# Altium PCB LS1C300B_176A_Msystem.PcbDoc (part 2 of 3)
Units mm, origin at the board's own origin, x right, y up, seen from the top; angles counter-clockwise.
Board outline 100.25 x 70.25 mm, 2 copper layers (Top Layer, Bottom Layer); 139 components, 183 nets, 683 pads, 164 vias.
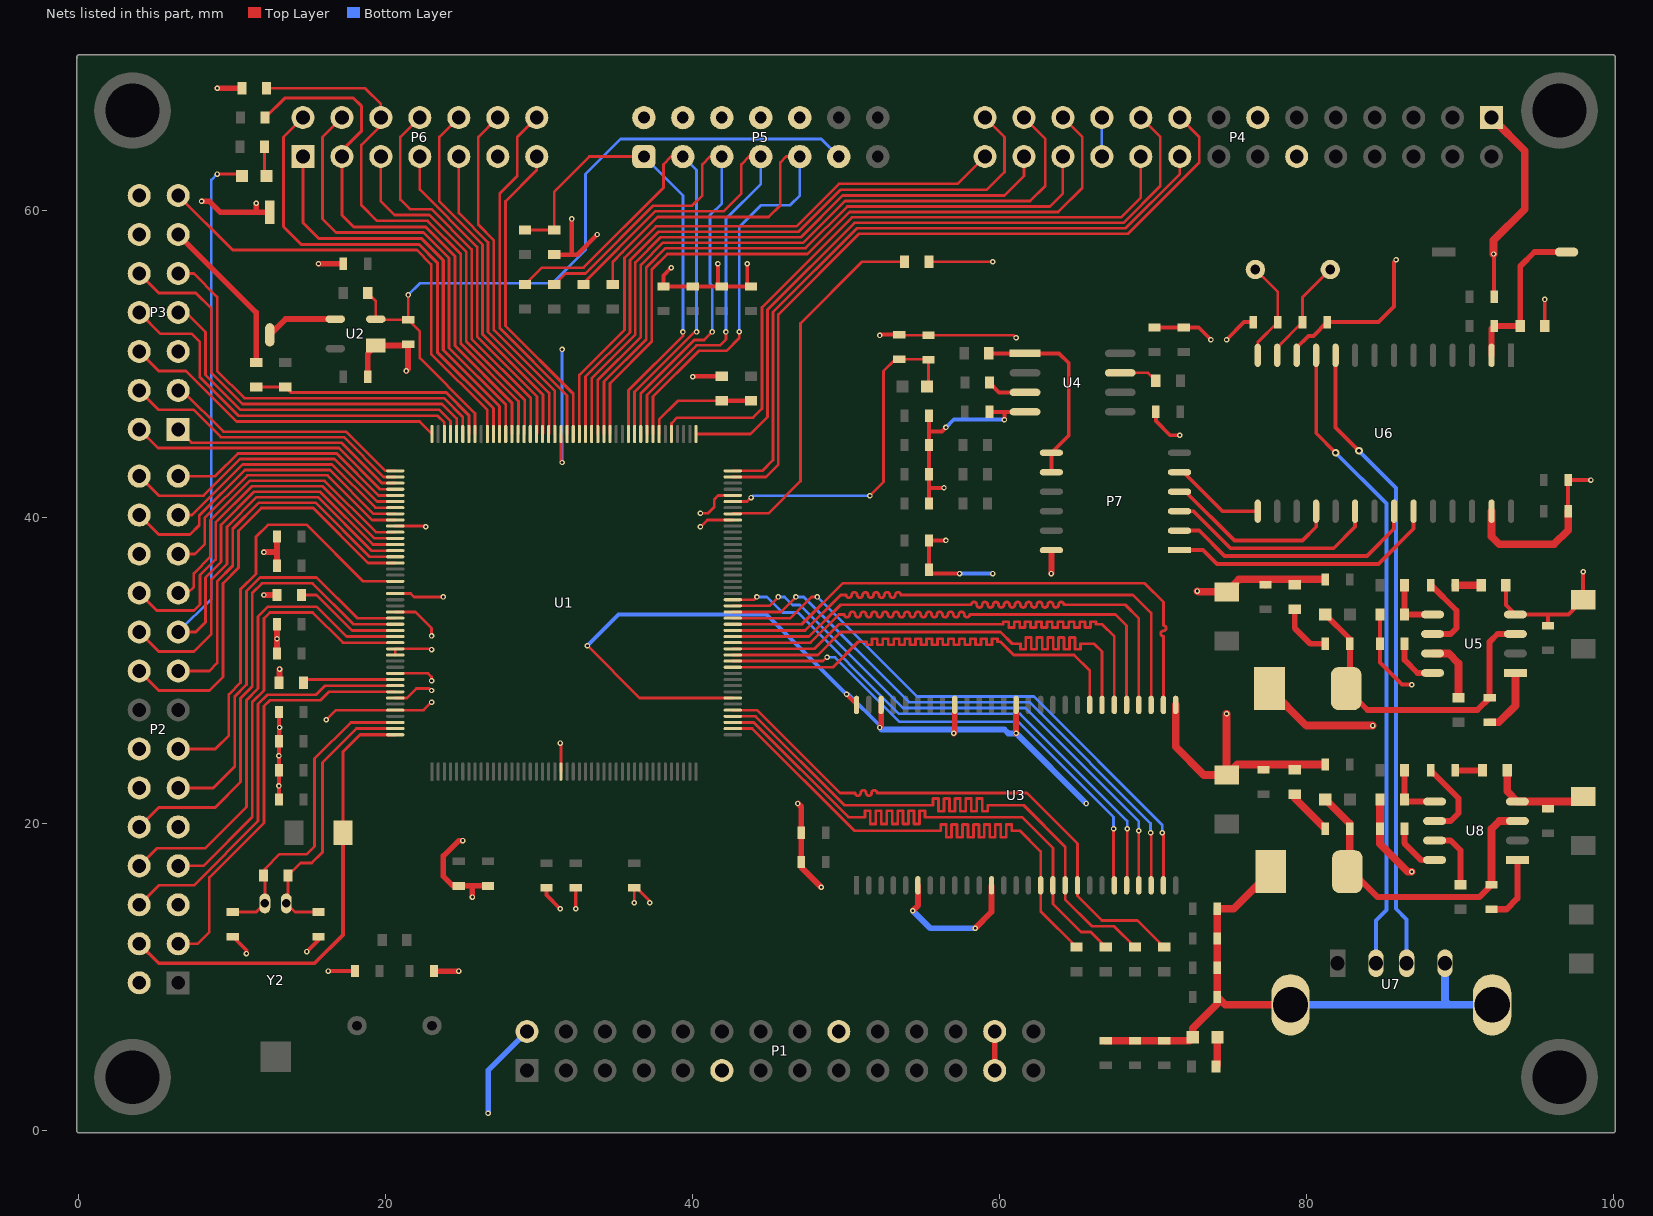
[diagram p2: the nets of this part, all layers, seen from the top]

## Via types
v1: diameter 0.356, hole 0.178, Top Layer to Bottom Layer, 153 vias
v2: diameter 0.508, hole 0.254, Top Layer to Bottom Layer, 4 vias
v3: diameter 1.5, hole 0.75, Top Layer to Bottom Layer, 3 vias
v4: diameter 0.762, hole 0.381, Top Layer to Bottom Layer, 2 vias
v5: diameter 0.6, hole 0.3, Top Layer to Bottom Layer, 1 vias
v6: diameter 0.8, hole 0.4, Top Layer to Bottom Layer, 1 vias

## Nets (pads, with @x,y where several pads share a name; then routed paths per layer and width w, separated by ;. In a path a pad name is that pad's centre, name@x,y a point inside that pad or via, vN(x,y) a via of type N, cw(c..) or ccw(c..) an arc to the next point about the centre after c; other vN are vias at no path point) (continued)
87: P4.17 U1.87 | length 48.1
  Top Layer w0.178: U1.87@42.623,42.617 44.776,42.617 45.593,43.434 45.593,53.213 50.851,58.471 68.382,58.471 73.025,63.114 73.025,64.77 P4.17@71.755,66.04
88: P4.18 U1.88 | length 43.9
  Top Layer w0.178: U1.88@42.623,43.017 44.541,43.017 45.237,43.713 45.237,53.36 50.704,58.826 68.224,58.826 71.755,62.357 P4.18@71.755,63.5
89: P4.19 U1.89 | length 46
  Top Layer w0.178: U1.89@40.223,45.417 43.766,45.417 44.882,46.533 44.882,53.518 50.546,59.182 68.072,59.182 70.485,61.595 70.485,64.77 P4.19@69.215,66.04
93: P4.20 U1.93 | length 43.9
  Top Layer w0.178: U1.93@38.623,45.417 38.623,46.116 38.989,46.482 43.942,46.482 44.526,47.066 44.526,53.67 50.394,59.538 67.92,59.538 69.215,60.833 P4.20@69.215,63.5
103: P4.23 U1.103 | length 47.2
  Top Layer w0.178: U1.103@34.623,45.417 34.623,48.72 37.338,51.435 37.338,56.134 38.354,57.15 47.498,57.15 50.241,59.893 63.83,59.893 65.405,61.468 65.405,64.77 P4.23@64.135,66.04
104: P4.24 U1.104 | length 43.6
  Top Layer w0.178: U1.104@34.223,45.417 34.223,48.828 36.982,51.587 36.982,56.281 38.232,57.531 47.371,57.531 50.089,60.249 63.297,60.249 64.135,61.087 P4.24@64.135,63.5
105: P4.25 U1.105 | length 45.7
  Top Layer w0.178: U1.105@33.823,45.417 33.823,48.936 36.627,51.74 36.627,56.429 38.085,57.887 47.219,57.887 49.936,60.604 62.001,60.604 62.992,61.595 62.992,64.643 P4.25@61.595,66.04
106: P4.26 U1.106 | length 41.3
  Top Layer w0.178: U1.106@33.423,45.417 33.423,49.044 36.271,51.892 36.271,56.591 37.922,58.242 47.066,58.242 49.784,60.96 60.325,60.96 61.595,62.23 P4.26@61.595,63.5
107: P4.27 U1.107 | length 43.4
  Top Layer w0.178: U1.107@33.023,45.417 33.023,49.152 35.916,52.045 35.916,56.744 37.77,58.598 46.914,58.598 49.657,61.341 59.182,61.341 60.325,62.484 60.325,64.77 P4.27@59.055,66.04
108: P4.28 U1.108 | length 38.9
  Top Layer w0.178: U1.108@32.623,45.417 32.623,49.26 35.56,52.197 35.56,56.896 37.617,58.953 46.761,58.953 49.53,61.722 57.277,61.722 P4.28@59.055,63.5
109: P6.13 U1.109 | length 20.8
  Top Layer w0.178: P6.13@29.845,63.5 29.845,62.611 27.813,60.579 27.813,52.451 32.223,48.041 U1.109@32.223,45.417
110: P6.14 U1.110 | length 23.4
  Top Layer w0.178: P6.14@29.845,66.04 28.575,64.77 28.575,62.23 27.432,61.087 27.432,52.324 31.823,47.933 U1.110@31.823,45.417
112: P6.12 U1.112 | length 23.2
  Top Layer w0.178: P6.12@27.305,66.04 26.035,64.77 26.035,59.055 27.051,58.039 27.051,52.197 31.023,48.225 U1.112@31.023,45.417
113: P6.9 U1.113 | length 20.5
  Top Layer w0.178: P6.9@24.765,63.5 24.765,59.817 26.67,57.912 26.67,52.07 30.656,48.084 30.656,45.45 U1.113@30.623,45.417
114: P6.10 U1.114 | length 24
  Top Layer w0.178: P6.10@24.765,66.04 23.495,64.77 23.495,60.579 26.314,57.76 26.314,51.918 30.256,47.976 30.256,45.45 U1.114@30.223,45.417
115: P6.7 U1.115 | length 21.3
  Top Layer w0.178: P6.7@22.225,63.5 22.225,61.341 25.959,57.607 25.959,51.765 29.856,47.868 29.856,45.45 U1.115@29.823,45.417
116: P6.8 U1.116 | length 25.5
  Top Layer w0.178: P6.8@22.225,66.04 20.955,64.77 20.955,60.706 21.59,60.071 22.987,60.071 25.603,57.455 25.603,51.613 29.456,47.76 29.456,45.45 U1.116@29.423,45.417
117: P6.5 U1.117 | length 23.3
  Top Layer w0.178: P6.5@19.685,63.5 19.685,60.579 20.574,59.69 22.86,59.69 25.248,57.302 25.248,51.46 29.056,47.652 29.056,45.45 U1.117@29.023,45.417
118(5): P6.6 R16.2 U1.118 | length 36.1
  Top Layer w0.178: R16.2@12.23,67.945 18.669,67.945 19.685,66.929 P6.6@19.685,66.04 19.685,65.532 18.415,64.262 18.415,60.325 19.431,59.309 22.733,59.309 24.892,57.15 24.892,51.308 28.656,47.544 28.656,45.45 U1.118@28.623,45.417
119(4): P6.3 R15.2 U1.119 | length 36.3
  Top Layer w0.2: R15.2@12.141,66.04 13.411,67.31 17.907,67.31 18.415,66.802 18.415,65.151 17.145,63.881 P6.3@17.145,63.5 17.145,59.69 17.921,58.914 22.61,58.914 24.511,57.012 24.511,51.17 28.223,47.458 U1.119@28.223,45.417
120: P6.4 U1.120 | length 29.4
  Top Layer w0.178: P6.4@17.145,66.04 15.875,64.77 15.875,59.436 16.764,58.547 22.458,58.547 24.13,56.875 24.13,51.033 27.823,47.34 U1.120@27.823,45.417
121: P6.1 U1.121 | length 27.3
  Top Layer w0.2: P6.1@14.605,63.5 14.605,59.182 15.621,58.166 22.32,58.166 23.749,56.737 23.749,50.895 27.423,47.221 U1.121@27.423,45.417
122: P6.2 U1.122 | length 31.3
  Top Layer w0.2: P6.2@14.605,66.04 13.335,64.77 13.335,58.928 14.492,57.771 22.181,57.771 23.368,56.584 23.368,50.742 27.023,47.087 U1.122@27.023,45.417
123: P3.13 U1.123 | length 30.9
  Top Layer w0.178: P3.13@6.477,60.96 10.033,57.404 22.029,57.404 22.962,56.472 22.962,50.63 26.623,46.968 U1.123@26.623,45.417
127: P3.9 U1.127 | length 26.4
  Top Layer w0.178: P3.9@6.477,55.88 7.493,55.88 9.017,54.356 9.017,49.53 10.795,47.752 23.796,47.752 25.023,46.525 U1.127@25.023,45.417
128: P3.10 U1.128 | length 28.1
  Top Layer w0.178: P3.10@3.937,55.88 5.207,54.61 7.62,54.61 8.636,53.594 8.636,49.403 10.668,47.371 23.674,47.371 24.623,46.422 U1.128@24.623,45.417
129: P3.7 U1.129 | length 23.2
  Top Layer w0.178: P3.7@6.477,53.34 6.985,53.34 8.255,52.07 8.255,49.276 10.541,46.99 23.495,46.99 24.223,46.262 U1.129@24.223,45.417
130: P3.8 U1.130 | length 24.9
  Top Layer w0.178: P3.8@3.937,53.34 5.334,51.943 7.366,51.943 7.874,51.435 7.874,49.149 10.414,46.609 23.368,46.609 23.823,46.154 U1.130@23.823,45.417
132: P3.6 U1.132 | length 21.3
  Top Layer w0.178: P3.6@3.937,50.8 5.207,49.53 6.985,49.53 10.287,46.228 22.212,46.228 U1.132@23.023,45.417
133: P3.3 U1.133 | length 16.3
  Top Layer w0.178: P3.3@6.477,48.26 6.726,48.26 9.418,45.568 17.424,45.568 19.975,43.017 U1.133@20.623,43.017
134: P3.4 U1.134 | length 19
  Top Layer w0.178: P3.4@3.937,48.26 5.207,46.99 7.493,46.99 9.271,45.212 17.272,45.212 19.867,42.617 U1.134@20.623,42.617
135: P3.1 U1.135 | length 15.6
  Top Layer w0.178: P3.1@6.477,45.72 7.341,44.856 17.104,44.856 19.744,42.217 U1.135@20.623,42.217
136: P3.2 U1.136 | length 18.3
  Top Layer w0.178: P3.2@3.937,45.72 5.156,44.501 16.957,44.501 19.641,41.817 U1.136@20.623,41.817
137: P2.27 U1.137 | length 15.9
  Top Layer w0.178: P2.27@6.477,42.672 8.89,42.672 10.363,44.145 16.81,44.145 19.538,41.417 U1.137@20.623,41.417
138: P2.28 U1.138 | length 19.3
  Top Layer w0.178: P2.28@3.937,42.672 5.207,41.402 8.128,41.402 10.516,43.79 16.662,43.79 19.435,41.017 U1.138@20.623,41.017
139: P2.25 U1.139 | length 16.7
  Top Layer w0.178: P2.25@6.477,40.132 7.366,40.132 10.668,43.434 16.505,43.434 19.322,40.617 U1.139@20.623,40.617
140: P2.26 U1.140 | length 20.5
  Top Layer w0.178: P2.26@3.937,40.132 5.207,38.862 7.239,38.862 7.849,39.472 7.849,40.107 10.82,43.078 16.358,43.078 19.219,40.217 U1.140@20.623,40.217
141: P2.23 U1.141 | length 18.5
  Top Layer w0.178: P2.23@6.477,37.592 7.569,37.592 8.204,38.227 8.204,39.939 10.988,42.723 16.205,42.723 19.111,39.817 U1.141@20.623,39.817
143: P2.21 U1.143 | length 20.5
  Top Layer w0.178: P2.21@6.477,35.052 7.087,35.052 7.493,35.458 7.493,36.322 8.56,37.389 8.56,39.792 11.135,42.367 16.017,42.367 19.367,39.017 U1.143@20.623,39.017
144: P2.22 U1.144 | length 24.4
  Top Layer w0.178: P2.22@3.937,35.052 5.08,33.909 7.493,33.909 7.899,34.315 7.899,36.22 8.915,37.236 8.915,39.644 11.283,42.012 15.87,42.012 19.264,38.617 U1.144@20.623,38.617
145: D3.2 P2.19 U1.145 | length 55.2
  Top Layer w0.178: P2.19@6.477,32.512 7.62,32.512 8.255,33.147 8.255,36.068 9.271,37.084 9.271,39.497 11.43,41.656 15.722,41.656 19.161,38.217 U1.145@20.623,38.217 ; v1(9.017,62.357) 10.503,62.357 D3.2@10.63,62.23 D3.2@10.541,62.141
  Bottom Layer w0.178: P2.19@6.477,32.512 8.636,34.671 8.636,61.976 v1(9.017,62.357)
146: P2.20 U1.146 | length 26.3
  Top Layer w0.178: P2.20@3.937,32.512 5.207,31.242 7.493,31.242 8.636,32.385 8.636,35.941 9.652,36.957 9.652,39.37 11.582,41.3 15.575,41.3 19.059,37.817 U1.146@20.623,37.817
147: P2.17 U1.147 | length 24.7
  Top Layer w0.178: P2.17@6.477,29.972 8.509,29.972 9.017,30.48 9.017,35.814 10.033,36.83 10.033,39.243 11.735,40.945 15.428,40.945 18.956,37.417 U1.147@20.623,37.417
148: P2.18 U1.148 | length 28.6
  Top Layer w0.178: P2.18@3.937,29.972 5.207,28.702 8.509,28.702 9.398,29.591 9.398,35.687 10.414,36.703 10.414,39.106 11.897,40.589 15.281,40.589 18.853,37.017 U1.148@20.623,37.017
151: P2.13 U1.151 | length 28.3
  Top Layer w0.178: P2.13@6.477,24.892 8.89,24.892 9.779,25.781 9.779,28.448 10.541,29.21 10.541,35.301 11.544,36.304 11.544,38.722 12.319,39.497 14.859,39.497 18.539,35.817 U1.151@20.623,35.817
157: P2.11 U1.157 | length 27.2
  Top Layer w0.178: P2.11@6.477,22.352 8.763,22.352 10.16,23.749 10.16,28.321 10.922,29.083 10.922,35.179 11.811,36.068 15.494,36.068 18.145,33.417 U1.157@20.623,33.417
158: P2.10 U1.158 | length 31.1
  Top Layer w0.178: P2.10@3.937,19.812 5.207,21.082 8.89,21.082 10.541,22.733 10.541,28.194 11.303,28.956 11.303,35.052 11.938,35.687 15.24,35.687 17.91,33.017 U1.158@20.623,33.017
160: P2.8 U1.160 | length 31.3
  Top Layer w0.178: P2.8@3.937,17.272 5.08,18.415 8.23,18.415 10.922,21.107 10.922,28.067 11.684,28.829 11.684,33.523 12.324,34.163 15.494,34.163 17.44,32.217 U1.160@20.623,32.217
161: P2.7 U1.161 | length 28.9
  Top Layer w0.178: P2.7@6.477,17.272 8.128,17.272 11.303,20.447 11.303,27.94 12.065,28.702 12.065,33.401 12.446,33.782 15.24,33.782 17.205,31.817 U1.161@20.623,31.817
168: P2.6 U1.168 | length 27.1
  Top Layer w0.178: P2.6@3.937,14.732 5.207,16.002 7.493,16.002 11.684,20.193 11.684,27.813 12.294,28.423 15.469,28.423 16.063,29.017 U1.168@20.623,29.017
169: P2.3 U1.169 | length 27.5
  Top Layer w0.178: P2.3@6.477,12.192 7.747,12.192 8.509,12.954 8.509,16.51 12.065,20.066 12.065,27.686 12.446,28.067 15.748,28.067 16.298,28.617 U1.169@20.623,28.617
ADC_VDDA: C18.2 C19.2 L1.2 U1.83 | length 22.6
  Top Layer w0.178: U1.83@42.623,41.017 43.557,41.017 v1(43.815,41.275) ; v1(51.562,41.402) 52.451,42.291 52.451,49.53 53.213,50.292 C19.2@53.467,50.292 55.334,50.292 C18.2@55.372,50.254 55.372,48.603 L1.2@55.283,48.514
  Bottom Layer w0.178: v1(43.815,41.275) 43.942,41.402 v1(51.562,41.402)
C\H\_\C\S\: P7.5 U6.15 | length 6.1
  Top Layer w0.254: P7.5@71.739,42.926 72.009,42.926 74.549,40.386 U6.15@76.835,40.386
CH_CLK_SPI0_CLK: P7.4 U6.18 | length 11.6
  Top Layer w0.254: P7.4@71.739,41.656 72.136,41.656 75.311,38.481 79.756,38.481 80.645,39.37 U6.18@80.645,40.386
CH_MISO_SPI0_MISO: P7.2 U6.22 | length 16.5
  Top Layer w0.254: P7.2@71.739,39.116 73.025,39.116 74.676,37.465 83.947,37.465 85.725,39.243 U6.22@85.725,40.386
CH_MOSI_SPI0_MOSI: P7.3 U6.20 | length 14
  Top Layer w0.254: P7.3@71.739,40.386 72.644,40.386 75.057,37.973 81.788,37.973 83.185,39.37 U6.20@83.185,40.386
CH_SDA: P7.1 U6.23 | length 17.7
  Top Layer w0.254: P7.1@71.739,37.846 73.279,37.846 74.168,36.957 84.709,36.957 86.995,39.243 U6.23@86.995,40.386
EJTAG_RST: P5.1 R34.1 R35.1 U1.100 | length 31.8
  Top Layer w0.178: R34.1@29.083,58.712 R35.1@30.988,58.712 30.988,61.214 33.274,63.5 P5.1@36.83,63.5 ; U1.100@35.823,45.417 35.823,48.269 39.37,51.816 v1(39.37,52.07)
  Bottom Layer w0.178: P5.1@36.83,63.5 39.37,60.96 v1(39.37,52.07)
EJTAG_SEL: R38.1 R39.1 U1.95 | length 7.4
  Top Layer w0.178: U1.95@37.823,45.417 37.823,46.362 39.047,47.587 R39.1@41.91,47.587
  Top Layer w0.3: R39.1@41.91,47.587 R38.1@43.815,47.587
EJTAG_TCK: P5.5 R30.1 U1.96 | length 42.4
  Top Layer w0.178: R30.1@34.798,55.156 34.798,56.637 35.433,57.272 35.433,57.277 37.719,59.563 44.958,59.563 45.72,60.325 45.72,63.119 46.101,63.5 P5.5@46.99,63.5 ; U1.96@37.423,45.417 37.423,47.857 40.404,50.838 42.202,50.838 43.04,51.676 v1(43.04,52.083)
  Bottom Layer w0.178: v1(43.04,52.083) 43.04,58.915 44.45,60.325 46.355,60.325 46.99,60.96 P5.5@46.99,63.5
EJTAG_TDI: P5.2 R33.1 U1.99 | length 34.8
  Top Layer w0.178: R33.1@29.083,55.156 30.188,56.261 32.893,56.261 38.1,61.468 38.1,62.992 38.608,63.5 P5.2@39.37,63.5 ; U1.99@36.223,45.417 36.223,48.166 40.127,52.07 v1(40.259,52.07)
  Bottom Layer w0.178: P5.2@39.37,63.5 40.259,62.611 v1(40.259,52.07)
EJTAG_TDO: P5.3 R32.1 U1.98 | length 36.3
  Top Layer w0.178: R32.1@30.988,55.156 31.712,55.88 33.02,55.88 37.44,60.3 39.98,60.3 40.64,60.96 40.64,62.992 41.148,63.5 P5.3@41.91,63.5 ; U1.98@36.623,45.417 36.623,48.063 40.109,51.549 40.754,51.549 v1(41.275,52.07)
  Bottom Layer w0.178: v1(41.275,52.07) 41.275,55.105 41.135,55.245 41.135,59.677 41.91,60.452 P5.3@41.91,63.5
EJTAG_TMS: P5.4 R31.1 U1.97 | length 38.3
  Top Layer w0.178: R31.1@32.809,55.156 37.597,59.944 42.037,59.944 43.18,61.087 43.18,62.992 43.688,63.5 P5.4@44.45,63.5 ; U1.97@37.023,45.417 37.023,47.96 40.256,51.194 41.796,51.194 42.177,51.575 v1(42.177,52.07)
  Bottom Layer w0.178: v1(42.177,52.07) 42.177,59.449 44.45,61.722 P5.4@44.45,63.5
FLASH_CS0: P7.7 P7.8 R6.2 U4.1 | length 13
  Top Layer w0.254: R6.2@59.309,50.673 U4.1@61.67,50.673 63.881,50.673 64.516,50.038 64.516,45.323 P7.7@63.389,44.196 P7.8@63.389,42.926
GND: C1.1 C2.1 C3.1 C4.1 C5.1 C6.1 C7.1 C8.1 C9.1 C10.1 C11.1 C12.1 C13.1 C14.1 C15.1 C16.1 C17.1 C18.1 C19.1 C20.1 C21.1 C22.1 C23.1 C24.1 C25.1 C26.1 C27.1 C28.1 C29.1 C30.1 C31.1 C32.1 C33.2 C36.2 C37.1 C38.1 C39.1 C40.1 C41.1 C42.1 C43.1 C44.1 C45.1 C46.1 C47.1 C48.1 C49.2 C53.2 C54.1 C56.1 C57.1 C58.1 C59.1 C60.2 C61.2 C62.1 C63.1 C64.1 C65.1 C67.2 C68.2 C69.1 D2.1 D4.1 D5.2 P1.2 P1.11 P1.18 P1.25 P1.26 P2.2 P2.5 P2.9 P2.12 P2.14 P2.24 P3.5 P3.11 P3.12 P3.14 P4.1 P4.12 P4.13 P4.21 P4.22 P5.10 P5.11 P5.12 P5.13 P5.14 P6.11 P7.12 R2.1 R4.1 R8.2 R11.1 R12.2 R14.1 R16.1 R20.1 R26.1 R27.2 R29.1 R35.2 R37.2 R39.2 S2.1 U1.22 U1.51 U1.80 U1.84 U1.111 U1.142 U1.153 U1.156 U1.162 U1.163 U1.166 U1.170 U1.172 U2.1 U3.6 U3.12 U3.28 U3.41 U3.46 U3.52 U3.54 U4.4 U5.4 U6.12 U6.27 U7.4 U7.5 U7.6 U8.4 | length 384.4
  Top Layer w0.178: v1(16.129,26.797) 16.749,27.417 U1.172@20.623,27.417 22.464,27.417 v1(22.987,27.94) ; U1.170@20.623,28.217 21.385,28.217 21.997,28.829 22.86,28.829 v1(22.987,28.702) ; U1.166@20.623,29.817 22.761,29.817 22.987,29.591 v1(22.987,29.337) ; U1.163@20.623,31.017 U1.162@20.623,31.417 22.939,31.417 v1(22.987,31.369) ; U1.156@20.623,33.817 21.936,33.817 22.987,32.766 v1(22.987,32.258) ; U1.153@20.623,35.017 21.625,35.017 21.844,34.798 v1(23.749,34.798) ; U1.142@20.623,39.417 22.559,39.417 v1(22.606,39.37) ; v1(31.369,25.273) 31.423,25.219 U1.22@31.423,23.417 ; U1.111@31.423,45.417 31.423,43.634 v1(31.496,43.561) ; v1(33.147,31.623) 36.553,28.217 U1.51@42.623,28.217 ; v1(36.195,14.859) C22.1@36.195,15.837 36.36,15.837 37.211,14.986 v1(37.211,14.859) ; v1(40.513,39.37) 40.96,39.817 U1.80@42.623,39.817 ; v1(40.513,40.259) 41.021,40.259 41.415,40.653 41.415,41.161 41.671,41.417 U1.84@42.623,41.417 ; C19.1@53.467,51.892 53.505,51.854 C18.1@55.372,51.854 60.922,51.854 v1(61.087,51.689) ; R20.1@55.41,56.642 v1(59.563,56.642)
  Top Layer w0.254: C4.1@10.033,12.662 10.922,11.773 v1(10.922,11.557) ; C13.1@13.043,21.59 v1(13.043,22.479) C14.1@13.043,23.495 v1(13.043,24.447) C28.1@13.043,25.4 ; C29.1@13.043,27.305 C28.1@13.043,25.4 ; v1(13.081,26.289) 13.081,25.438 C28.1@13.043,25.4 ; v1(14.859,11.684) 15.621,12.446 C3.1@15.621,12.662 ; v1(16.256,10.414) C1.1@17.996,10.414 ; C5.1@30.48,15.837 30.48,15.367 v1(31.369,14.478) ; v1(32.385,14.478) C6.1@32.385,15.837 ; v1(38.608,56.261) 38.1,55.753 C11.1@38.1,55.029 C10.1@40.005,55.029 43.561,55.029 v1(43.561,56.515) ; C26.1@41.656,55.029 v1(41.656,56.515) ; v1(50.038,28.448) 50.686,27.8 U3.54@50.686,27.762 ; v1(52.197,51.841) 52.248,51.892 C19.1@53.467,51.892 ; C7.1@55.41,40.894 55.41,41.91 ; C17.1@55.41,46.609 55.41,45.593 ; v1(56.388,41.91) 55.41,41.91 ; v1(56.515,38.481) C24.1@55.41,38.481 C23.1@55.41,36.576 55.664,36.322 v1(57.404,36.322) ; v1(56.515,45.847) 56.261,45.593 55.41,45.593 ; C48.1@59.347,46.863 60.325,46.863 ; v1(60.325,46.355) 60.325,46.863 ; U4.4@61.67,46.863 60.325,46.863 ; C47.1@70.104,52.362 C46.1@72.009,52.362 72.987,52.362 v1(73.787,51.562) ; C59.1@70.193,46.863 70.193,46.266 71.12,45.339 v1(71.755,45.339) ; v1(74.803,51.562) 75.946,52.705 C64.1@76.543,52.705 ; U6.12@79.375,50.546 79.375,51.054 80.137,51.816 80.467,51.816 C63.1@81.356,52.705 84.709,52.705 85.725,53.721 85.725,56.642 v1(85.852,56.769) ; R14.1@84.798,33.655 C49.2@84.798,31.75 84.798,30.518 86.233,29.083 v1(86.868,29.083) ; v1(92.202,57.15) 92.24,57.112 C56.1@92.24,54.356 ; R11.1@93.002,35.56 93.002,34.285 U5.4@93.632,33.655 95.758,33.655 ; R8.2@95.542,52.832 v1(95.542,54.191) ; C54.1@95.758,32.931 95.758,33.655 ; C57.1@97.066,40.386 C58.1@97.066,42.418 v1(98.552,42.418) ; v1(98.044,36.449) C53.2@98.044,34.62 97.079,33.655 95.758,33.655 ; 55.41,41.91 C8.1@55.41,42.799 C9.1@55.41,44.704 55.41,45.593
  Top Layer w0.3: R35.2@30.988,57.112 32.131,57.112 ; v1(32.131,59.436) 32.131,57.112 ; v1(33.782,58.42) 32.474,57.112 32.131,57.112 ; v1(40.005,49.149) 40.043,49.187 R39.2@41.91,49.187
  Top Layer w0.356: P3.11@6.477,58.42 11.557,53.34 R37.2@11.557,50.076 ; v1(8.001,60.579) 8.509,60.579 9.208,59.88 11.557,59.88 ; v1(9.017,67.945) R16.1@10.63,67.945 ; v1(11.557,60.452) 11.557,59.88 ; S2.1@12.446,59.88 11.557,59.88 ; C12.1@18.834,49.149 18.834,50.661 U2.1@19.354,51.181 ; C2.1@23.152,10.414 v1(24.765,10.414) ; v1(25.019,18.923) 24.765,18.923 23.762,17.92 23.762,16.586 24.384,15.964 C20.1@24.765,15.964 25.654,15.964 ; v1(25.654,15.24) 25.654,15.964 ; C21.1@26.67,15.964 25.654,15.964 ; v1(52.197,26.289) 52.286,26.378 U3.52@52.286,27.762 ; P1.25@59.69,3.937 P1.26@59.69,6.477
  Top Layer w0.381: v1(12.065,34.925) R4.1@12.916,34.925 ; v1(12.065,37.719) 12.916,37.719 ; C15.1@12.916,31.115 v1(12.916,32.067) C30.1@12.916,33.02 ; C16.1@12.916,36.83 12.916,37.719 ; C31.1@12.916,38.735 12.916,37.719 ; R2.1@13.043,29.21 13.081,29.248 v1(13.081,30.099) ; v1(15.621,56.515) C27.1@17.234,56.515 ; U2.1@19.354,51.181 21.374,51.181 C32.1@21.463,51.27 21.463,49.657 v1(21.336,49.53) ; v1(46.863,21.336) 47.079,21.12 C38.1@47.079,19.431 C39.1@47.079,17.526 47.079,17.183 v1(48.387,15.875) ; v1(54.356,14.351) 54.686,14.681 U3.6@54.686,16.002 ; v1(57.023,25.909) 57.086,25.972 U3.46@57.086,27.762 ; v1(58.42,13.208) 59.486,14.274 U3.12@59.486,16.002 ; U3.41@61.086,27.762 v1(61.087,25.908) v1(61.087,25.908) ; v1(63.373,36.322) 63.389,36.338 P7.12@63.389,37.846
  Top Layer w0.5: C44.1@66.929,5.88 C45.1@68.834,5.88 C43.1@70.739,5.88 72.39,5.88 D5.2@72.606,6.096 72.606,6.693 74.206,8.293 C40.1@74.206,8.725 ; U3.28@71.486,27.762 71.486,25.034 73.33,23.19 C68.2@74.803,23.19 ; v1(72.898,35.179) 72.949,35.128 C61.2@74.803,35.128 75.616,35.941 77.47,35.941 ; v1(74.803,27.178) C68.2@74.803,23.19 ; C69.1@77.216,23.533 77.216,23.749 77.343,23.876 ; C62.1@77.343,35.598 77.343,35.814 77.47,35.941 ; D4.1@77.597,28.829 80.01,26.416 v1(84.328,26.416) ; D2.1@77.677,16.891 75.264,14.478 C42.1@74.206,14.478 C37.1@74.206,12.535 C41.1@74.206,10.63 C40.1@74.206,8.725 ; U7.5@78.972,8.212 74.719,8.212 C40.1@74.206,8.725 ; R27.2@79.248,23.533 79.248,23.876 ; C67.2@81.242,23.876 79.248,23.876 ; C60.2@81.242,35.941 77.47,35.941 ; R29.1@84.798,21.59 C33.2@84.798,19.685 84.798,18.707 86.614,16.891 v1(86.868,16.891) ; U6.27@92.075,40.386 92.075,38.735 92.583,38.227 96.139,38.227 97.066,39.154 C57.1@97.066,40.386 ; v1(92.202,57.15) 92.202,58.039 94.234,60.071 94.234,63.881 P4.1@92.202,65.913 ; R26.1@93.091,23.495 93.091,22.131 U8.4@93.759,21.463 95.758,21.463 ; C65.1@95.758,20.993 95.758,21.463 ; C36.2@98.044,21.793 97.714,21.463 95.758,21.463 ; C68.2@74.803,23.19 75.489,23.876 77.343,23.876 ; 77.343,23.876 79.248,23.876
  Bottom Layer w0.178: v1(31.496,43.561) v1(31.496,50.927) ; P4.22@66.675,63.5 P4.21@66.675,66.04
  Bottom Layer w0.254: v1(33.147,31.623) 35.179,33.655 44.831,33.655 v1(50.038,28.448) 50.165,28.448 52.197,26.416 v1(52.197,26.289) ; v1(56.515,45.847) 57.023,46.355 v1(60.325,46.355) ; v1(57.404,36.322) v1(59.563,36.322)
  Bottom Layer w0.356: P2.2@3.937,9.271 P2.2@3.937,9.652 ; v1(26.67,1.143) 26.67,3.937 P1.2@29.21,6.477
  Bottom Layer w0.381: v1(52.197,26.289) 52.324,26.162 60.325,26.162 60.579,25.908 v1(61.087,25.908) v1(65.659,21.336) ; v1(54.356,14.351) 55.499,13.208 v1(58.42,13.208)
  Bottom Layer w0.5: U7.5@78.972,8.212 89.281,8.212 ; U7.4@89.042,10.922 89.042,8.451 89.281,8.212 ; U7.6@92.112,8.212 89.281,8.212
JTAG_SEL: R36.1 R37.1 U1.126 | length 15.9
  Top Layer w0.2: R37.1@11.557,48.476 R36.1@13.462,48.476 13.805,48.133 23.934,48.133 25.423,46.644 U1.126@25.423,45.417
NetC33_1: C33.1 U8.8 | length 3.3
  Top Layer w0.4: C33.1@86.398,19.685 86.398,18.758 87.503,17.653 U8.8@88.359,17.653
NetC34_1: C34.1 U8.1 | length 4.5
  Top Layer w0.4: C34.1@92.075,14.44 93.053,14.44 93.759,15.146 U8.1@93.759,17.653
NetC34_2: C34.2 C66.2 D2.2 L3.2 U8.3 | length 21.1
  Top Layer w0.4: D2.2@82.842,17.056 84.658,15.24 91.275,15.24 C34.2@92.075,16.04
  Top Layer w0.5: L3.2@81.242,21.59 81.28,21.59 82.842,20.028 C66.2@82.842,19.685 D2.2@82.842,17.056 ; C34.2@92.075,16.04 92.075,19.685 92.583,20.193 U8.3@93.759,20.193
NetC35_1: C35.1 R26.2 | length 1.8
  Top Layer w0.381: C35.1@89.7,23.495 R26.2@91.491,23.495
NetC35_2: C35.2 U8.6 | length 5.3
  Top Layer w0.381: C35.2@88.1,23.495 89.916,21.679 89.916,20.701 89.408,20.193 U8.6@88.359,20.193
NetC49_1: C49.1 U5.8 | length 3.2
  Top Layer w0.381: C49.1@86.398,31.75 86.398,30.696 87.249,29.845 U5.8@88.232,29.845
NetC50_1: C50.1 U5.1 | length 4.3
  Top Layer w0.5: C50.1@91.948,26.632 92.545,26.632 93.632,27.719 U5.1@93.632,29.845
NetC50_2: C50.2 C55.2 D4.2 L2.2 U5.3 | length 21.4
  Top Layer w0.381: L2.2@81.242,33.655 82.842,32.055 C55.2@82.842,31.75 82.842,29.074 D4.2@82.597,28.829 83.994,27.432 91.148,27.432 C50.2@91.948,28.232 91.948,31.877 92.456,32.385 U5.3@93.632,32.385
NetC51_1: C51.1 R11.2 | length 1.7
  Top Layer w0.508: C51.1@89.7,35.56 R11.2@91.402,35.56
NetC51_2: C51.2 U5.6 | length 5.2
  Top Layer w0.381: C51.2@88.1,35.56 88.138,35.56 89.789,33.909 89.789,32.766 89.408,32.385 U5.6@88.232,32.385
NetC52_1: C52.1 R8.1 S1.2 U6.2 | length 11
  Top Layer w0.381: U6.2@92.075,50.546 92.075,52.286 C52.1@92.24,52.451 R8.1@93.942,52.451 93.942,56.35 94.869,57.277 S1.2@96.964,57.277
NetC55_1: C55.1 R12.1 | length 3.6
  Top Layer w0.381: R12.1@79.248,33.998 79.248,32.766 80.264,31.75 C55.1@81.242,31.75
NetC63_2: C63.2 U6.13 Y3.1 | length 7
  Top Layer w0.178: U6.13@78.105,50.546 78.105,51.054 C63.2@79.756,52.705 79.756,54.329 Y3.1@81.561,56.134
NetC64_2: C64.2 U6.14 Y3.2 | length 6.7
  Top Layer w0.178: Y3.2@76.681,56.134 78.143,54.672 C64.2@78.143,52.705 76.835,51.397 U6.14@76.835,50.546
NetC66_1: C66.1 R27.1 | length 3.1
  Top Layer w0.5: R27.1@79.248,21.933 79.248,21.679 C66.1@81.242,19.685
NetD3_1: D3.1 R3.1 | length 2
  Top Layer w0.178: R3.1@12.103,64.135 12.103,62.357 D3.1@12.23,62.23
NetD5_1: D5.1 R1.1 | length 1.9
  Top Layer w0.5: R1.1@74.117,4.191 74.206,4.28 D5.1@74.206,6.096
NetR2_2: R2.2 U1.167 | length 6.1
  Top Layer w0.178: R2.2@14.643,29.21 14.85,29.417 U1.167@20.623,29.417
NetR4_2: R4.2 U1.159 | length 7.1
  Top Layer w0.178: R4.2@14.516,34.925 15.494,34.925 17.802,32.617 U1.159@20.623,32.617
NetR10_2: R10.2 U5.7 | length 4.2
  Top Layer w0.5: U5.7@88.232,31.115 89.281,31.115 89.916,30.48 R10.2@89.916,28.232
NetR13_1: R13.1 R14.2 U5.5 | length 3.7
  Top Layer w0.381: R13.1@86.398,35.56 R14.2@86.398,33.655 U5.5@88.232,33.655
NetR20_2: R20.2 U1.81 | length 24
  Top Layer w0.178: U1.81@42.623,40.217 42.656,40.25 44.949,40.25 47.041,42.342 47.041,52.629 51.054,56.642 R20.2@53.81,56.642
NetR25_2: R25.2 U8.7 | length 4.2
  Top Layer w0.381: U8.7@88.359,18.923 89.408,18.923 90.043,18.288 R25.2@90.043,16.04
NetR28_1: R28.1 R29.2 U8.5 | length 3.9
  Top Layer w0.381: R28.1@86.398,23.495 R29.2@86.398,21.59 86.525,21.463 U8.5@88.359,21.463
NetS2_2: S2.2 U2.3 | length 4.7
  Top Layer w0.381: S2.2@12.446,51.88 13.469,52.903 U2.3@16.714,52.903
NetU6_10: U6.10 U7.3 | length 41.5
  Top Layer w0.254: U6.10@81.915,50.546 81.915,45.847 v2(83.439,44.323)
  Bottom Layer w0.254: v2(83.439,44.323) 85.852,41.91 85.852,14.478 86.542,13.788 U7.3@86.542,10.922
NetU6_11: U6.11 U7.2 | length 41.8
  Top Layer w0.254: U6.11@80.645,50.546 80.645,45.466 v2(81.915,44.196)
  Bottom Layer w0.254: v2(81.915,44.196) 85.217,40.894 85.217,14.391 84.542,13.716 U7.2@84.542,10.922
RTC_VDDA: D1.2 P2.4 U1.176 | length 30.4
  Top Layer w0.2: D1.2@17.221,19.431 17.221,24.714 18.324,25.817 U1.176@20.623,25.817
  Top Layer w0.254: P2.4@3.937,12.192 5.207,10.922 15.367,10.922 17.221,12.776 D1.2@17.221,19.431
RTCI: C3.2 R41.2 U1.175 Y2.2 | length 18.6
  Top Layer w0.178: C3.2@15.621,14.262 14.091,14.262 Y2.2@13.527,14.826 13.627,14.926 R41.2@13.627,16.637 14.45,17.46 15.174,17.46 15.875,18.161 15.875,24.003 18.089,26.217 U1.175@20.623,26.217
RTCO: C4.2 R41.1 U1.174 Y2.1 | length 20.4
  Top Layer w0.178: C4.2@10.033,14.262 11.563,14.262 Y2.1@12.127,14.826 12.127,17.08 13.081,18.034 14.859,18.034 15.367,18.542 15.367,24.257 17.727,26.617 U1.174@20.623,26.617
S\D\R\A\M\_\C\A\S\: R23.2 U1.47 U3.17 | length 42
  Top Layer w0.178: U1.47@42.623,26.617 43.99,26.617 50.16,20.447 51.054,20.447 51.232,20.447 51.232,20.866 51.587,20.866 51.587,20.447 51.587,20.002 51.943,20.002 51.943,20.447 51.943,20.866 52.299,20.866 52.299,20.447 52.299,20.002 52.654,20.002 52.654,20.447 52.654,20.866 53.01,20.866 53.01,20.447 53.01,20.002 53.365,20.002 53.365,20.447 53.365,20.866 53.721,20.866 53.721,20.447 53.721,20.002 54.077,20.002 54.077,20.447 54.077,20.866 54.432,20.866 54.432,20.447 54.432,20.002 54.788,20.002 54.788,20.447 54.788,20.866 55.143,20.866 55.143,20.447 55.245,20.447 61.468,20.447 63.486,18.429 U3.17@63.486,16.002 63.486,14.784 65.316,12.954 65.951,12.954 R23.2@66.929,11.976
S\D\R\A\M\_\C\S\: R21.2 U1.49 U3.19 | length 37.3
  Top Layer w0.178: U1.49@42.623,27.417 44.206,27.417 49.602,22.021 50.242,22.021 50.598,22.021 ccw(c50.775,22.021) 50.953,22.021 cw(c51.131,22.021) 51.309,22.021 ccw(c51.487,22.021) 51.664,22.021 cw(c51.842,22.021) 52.02,22.021 52.197,22.021 61.799,22.021 65.086,18.734 U3.19@65.086,16.002 65.086,15.305 66.675,13.716 68.999,13.716 R21.2@70.739,11.976
S\D\R\A\M\_\R\A\S\: R22.2 U1.48 U3.18 | length 42.9
  Top Layer w0.178: U1.48@42.623,27.017 44.103,27.017 49.898,21.222 55.499,21.222 55.677,21.222 55.677,21.665 56.032,21.665 56.032,21.222 56.032,20.822 56.388,20.822 56.388,21.222 56.388,21.665 56.744,21.665 56.744,21.222 56.744,20.822 57.099,20.822 57.099,21.222 57.099,21.665 57.455,21.665 57.455,21.222 57.455,20.822 57.81,20.822 57.81,21.222 57.81,21.665 58.166,21.665 58.166,21.222 58.166,20.822 58.522,20.822 58.522,21.222 58.522,21.665 58.877,21.665 58.877,21.222 58.877,20.822 59.233,20.822 59.233,21.222 59.563,21.222 61.582,21.222 64.286,18.518 U3.18@64.286,16.002 64.286,15.089 66.04,13.335 67.475,13.335 R22.2@68.834,11.976
S\D\R\A\M\_\W\E\: R24.2 U1.46 U3.16 | length 41.2
  Top Layer w0.178: U1.46@42.623,26.217 43.887,26.217 50.546,19.558 55.994,19.558 56.172,19.558 56.172,19.962 56.528,19.962 56.528,19.558 56.528,19.142 56.883,19.142 56.883,19.558 56.883,19.962 57.239,19.962 57.239,19.558 57.239,19.142 57.594,19.142 57.594,19.558 57.594,19.962 57.95,19.962 57.95,19.558 57.95,19.142 58.306,19.142 58.306,19.558 58.306,19.962 58.661,19.962 58.661,19.558 58.661,19.142 59.017,19.142 59.017,19.558 59.017,19.962 59.372,19.962 59.372,19.558 59.372,19.142 59.728,19.142 59.728,19.558 59.728,19.962 60.084,19.962 60.084,19.558 60.084,19.142 60.439,19.142 60.439,19.558 60.439,19.962 60.795,19.962 60.795,19.558 61.15,19.558 61.214,19.558 61.341,19.558 62.686,18.213 U3.16@62.686,16.002 62.686,14.314 R24.2@65.024,11.976
S\P\I\_\H\O\L\D\: R5.2 U4.7 | length 2.5
  Top Layer w0.178: U4.7@67.87,49.403 69.685,49.403 R5.2@70.193,48.895
S\P\I\_\W\P\: R7.2 U4.3 | length 2.6
  Top Layer w0.254: R7.2@59.347,48.768 59.982,48.133 U4.3@61.67,48.133
S\Y\S\_\R\E\S\E\T\: C32.2 P5.6 R9.1 U1.125 U2.2 | length 50.6
  Top Layer w0.178: R9.1@18.834,54.61 19.354,54.09 U2.2@19.354,52.903 19.387,52.87 C32.2@21.463,52.87 ; v1(21.463,54.483) C32.2@21.463,52.87 ; U1.125@25.823,45.417 25.823,46.763 22.225,50.361 22.225,52.108 C32.2@21.463,52.87
  Bottom Layer w0.178: v1(21.463,54.483) 22.225,55.245 30.861,55.245 33.02,57.404 33.02,62.357 35.306,64.643 48.387,64.643 P5.6@49.53,63.5
SDRAM_A0: U1.67 U3.23 | length 36
  Top Layer w0.178: U1.67@42.623,34.617 44.015,34.617 v1(44.196,34.798) ; U3.23@68.286,16.002 68.326,16.042 v1(68.326,19.685)
  Bottom Layer w0.178: v1(44.196,34.798) 44.857,34.798 45.873,33.782 46.863,33.782 53.467,27.178 61.341,27.178 68.326,20.193 v1(68.326,19.685)
SDRAM_A1: U1.66 U3.24 | length 36.9
  Top Layer w0.178: U1.66@42.623,34.217 45.012,34.217 v1(45.593,34.798) ; U3.24@69.086,16.002 69.088,16.004 v1(69.088,19.558)
  Bottom Layer w0.178: v1(45.593,34.798) 46,34.798 46.52,34.277 47.003,34.277 53.721,27.559 61.696,27.559 69.088,20.167 v1(69.088,19.558)
SDRAM_A2: U1.65 U3.25 | length 37.8
  Top Layer w0.178: U1.65@42.623,33.817 45.755,33.817 v1(46.736,34.798) ; v1(69.85,19.431) 69.886,19.395 U3.25@69.886,16.002
  Bottom Layer w0.178: v1(46.736,34.798) 47.244,34.798 54.102,27.94 61.95,27.94 69.85,20.04 v1(69.85,19.431)
SDRAM_A3: U1.64 U3.26 | length 38.7
  Top Layer w0.178: U1.64@42.623,33.417 46.371,33.417 47.752,34.798 v1(48.133,34.798) ; v1(70.612,19.431) 70.686,19.357 U3.26@70.686,16.002
  Bottom Layer w0.178: v1(48.133,34.798) 54.623,28.308 62.243,28.308 70.612,19.939 v1(70.612,19.431)
SDRAM_A4: U1.63 U3.29 | length 36.8
  Top Layer w0.178: U1.63@42.623,33.017 47.114,33.017 49.784,35.687 69.469,35.687 70.686,34.47 70.686,33.655 70.686,33.299 70.686,32.944 cw(c70.686,32.766) 70.686,32.588 ccw(c70.686,32.41) 70.686,32.233 70.686,32.131 U3.29@70.686,27.762
SDRAM_A5: U1.62 U3.30 | length 36.7
  Top Layer w0.178: U1.62@42.623,32.617 42.633,32.607 47.339,32.607 49.657,34.925 50.013,34.925 ccw(c50.19,34.925) 50.368,34.925 cw(c50.546,34.925) 50.724,34.925 ccw(c50.902,34.925) 51.079,34.925 cw(c51.257,34.925) 51.435,34.925 ccw(c51.613,34.925) 51.791,34.925 cw(c51.968,34.925) 52.146,34.925 ccw(c52.324,34.925) 52.502,34.925 cw(c52.68,34.925) 52.857,34.925 ccw(c53.035,34.925) 53.213,34.925 cw(c53.391,34.925) 53.569,34.925 53.721,34.925 68.707,34.925 69.886,33.746 U3.30@69.886,27.762
SDRAM_A6: U1.61 U3.31 | length 36.8
  Top Layer w0.178: U1.61@42.623,32.217 47.584,32.217 49.657,34.29 58.166,34.29 cw(c58.344,34.29) 58.522,34.29 ccw(c58.699,34.29) 58.877,34.29 cw(c59.055,34.29) 59.233,34.29 ccw(c59.411,34.29) 59.588,34.29 cw(c59.766,34.29) 59.944,34.29 ccw(c60.122,34.29) 60.3,34.29 cw(c60.477,34.29) 60.655,34.29 ccw(c60.833,34.29) 61.011,34.29 cw(c61.189,34.29) 61.366,34.29 ccw(c61.544,34.29) 61.722,34.29 cw(c61.9,34.29) 62.078,34.29 ccw(c62.255,34.29) 62.433,34.29 cw(c62.611,34.29) 62.789,34.29 ccw(c62.967,34.29) 63.144,34.29 cw(c63.322,34.29) 63.5,34.29 ccw(c63.678,34.29) 63.856,34.29 cw(c64.033,34.29) 64.211,34.29 64.262,34.29 68.199,34.29 69.086,33.403 U3.31@69.086,27.762
SDRAM_A7: U1.60 U3.32 | length 36.6
  Top Layer w0.178: U1.60@42.623,31.817 47.692,31.817 49.53,33.655 49.886,33.655 ccw(c50.063,33.655) 50.241,33.655 cw(c50.419,33.655) 50.597,33.655 ccw(c50.775,33.655) 50.952,33.655 cw(c51.13,33.655) 51.308,33.655 ccw(c51.486,33.655) 51.664,33.655 cw(c51.841,33.655) 52.019,33.655 ccw(c52.197,33.655) 52.375,33.655 cw(c52.553,33.655) 52.73,33.655 ccw(c52.908,33.655) 53.086,33.655 cw(c53.264,33.655) 53.442,33.655 ccw(c53.619,33.655) 53.797,33.655 cw(c53.975,33.655) 54.153,33.655 ccw(c54.331,33.655) 54.508,33.655 cw(c54.686,33.655) 54.864,33.655 ccw(c55.042,33.655) 55.22,33.655 cw(c55.397,33.655) 55.575,33.655 ccw(c55.753,33.655) 55.931,33.655 cw(c56.109,33.655) 56.286,33.655 ccw(c56.464,33.655) 56.642,33.655 cw(c56.82,33.655) 56.998,33.655 ccw(c57.175,33.655) 57.353,33.655 cw(c57.531,33.655) 57.709,33.655 ccw(c57.887,33.655) 58.064,33.655 58.166,33.655 67.564,33.655 68.286,32.933 U3.32@68.286,27.762
SDRAM_A8: U1.59 U3.33 | length 36.7
  Top Layer w0.178: U1.59@42.623,31.417 47.932,31.417 49.535,33.02 60.071,33.02 60.249,33.02 60.249,33.185 60.604,33.185 60.604,33.02 60.604,32.803 60.96,32.803 60.96,33.02 60.96,33.185 61.316,33.185 61.316,33.02 61.316,32.803 61.671,32.803 61.671,33.02 61.671,33.185 62.027,33.185 62.027,33.02 62.027,32.803 62.382,32.803 62.382,33.02 62.382,33.185 62.738,33.185 62.738,33.02 62.738,32.803 63.094,32.803 63.094,33.02 63.094,33.185 63.449,33.185 63.449,33.02 63.449,32.803 63.805,32.803 63.805,33.02 63.805,33.185 64.16,33.185 64.16,33.02 64.16,32.803 64.516,32.803 64.516,33.02 64.516,33.185 64.872,33.185 64.872,33.02 64.872,32.803 65.227,32.803 65.227,33.02 65.227,33.185 65.583,33.185 65.583,33.02 65.583,32.803 65.938,32.803 65.938,33.02 65.938,33.185 66.294,33.185 66.294,33.02 66.472,33.02 66.675,33.02 67.486,32.209 U3.33@67.486,27.762
SDRAM_A9: U1.58 U3.34 | length 37
  Top Layer w0.178: U1.58@42.623,31.017 48.162,31.017 49.657,32.512 60.071,32.512 60.833,31.75 61.011,31.75 61.366,31.75 61.366,31.39 61.722,31.39 61.722,31.75 61.722,32.148 62.078,32.148 62.078,31.75 62.078,31.39 62.433,31.39 62.433,31.75 62.433,32.148 62.789,32.148 62.789,31.75 62.789,31.39 63.144,31.39 63.144,31.75 63.144,32.148 63.5,32.148 63.5,31.75 63.5,31.39 63.856,31.39 63.856,31.75 63.856,32.148 64.211,32.148 64.211,31.75 64.211,31.39 64.567,31.39 64.567,31.75 64.567,32.148 64.922,32.148 64.922,31.75 64.922,31.387 65.278,31.387 65.278,31.75 65.634,31.75 66.167,31.75 66.686,31.231 U3.34@66.686,27.762
SDRAM_A10: U1.57 U3.22 | length 33.7
  Top Layer w0.178: U1.57@42.623,30.617 48.504,30.617 48.748,30.861 v1(48.768,30.861) ; v1(67.437,19.685) 67.437,16.051 U3.22@67.486,16.002
  Bottom Layer w0.178: v1(48.768,30.861) 49.276,30.861 53.467,26.67 61.214,26.67 67.437,20.447 v1(67.437,19.685)
SDRAM_A11: U1.56 U3.35 | length 36.4
  Top Layer w0.178: U1.56@42.623,30.217 49.14,30.217 50.8,31.877 50.978,31.877 51.333,31.877 51.333,31.687 51.689,31.687 51.689,31.877 51.689,32.079 52.045,32.079 52.045,31.877 52.045,31.687 52.4,31.687 52.4,31.877 52.4,32.079 52.756,32.079 52.756,31.877 52.756,31.687 53.111,31.687 53.111,31.877 53.111,32.079 53.467,32.079 53.467,31.877 53.467,31.687 53.823,31.687 53.823,31.877 53.823,32.079 54.178,32.079 54.178,31.877 54.178,31.687 54.534,31.687 54.534,31.877 54.534,32.079 54.889,32.079 54.889,31.877 54.889,31.687 55.245,31.687 55.245,31.877 55.245,32.079 55.601,32.079 55.601,31.877 55.601,31.687 55.956,31.687 55.956,31.877 55.956,32.079 56.312,32.079 56.312,31.877 56.312,31.687 56.667,31.687 56.667,31.877 56.667,32.079 57.023,32.079 57.023,31.877 57.023,31.687 57.379,31.687 57.379,31.877 57.379,32.079 57.734,32.079 57.734,31.877 57.734,31.687 58.09,31.687 58.09,31.877 58.09,32.079 58.445,32.079 58.445,31.877 58.445,31.687 58.801,31.687 58.801,31.877 58.801,32.079 59.157,32.079 59.157,31.877 59.157,31.687 59.512,31.687 59.512,31.877 59.512,32.079 59.868,32.079 59.868,31.877 60.071,31.877 60.935,31.013 64.872,31.013 65.886,29.999 U3.35@65.886,27.762